# Altium PCB sensor PCB.PcbDoc
Units mm, origin at the board's own origin, x right, y up, seen from the top; angles counter-clockwise.
Board outline 39.37 x 30.48 mm, 2 copper layers (Top Layer, Bottom Layer); 33 components, 21 nets, 82 pads, 0 vias.
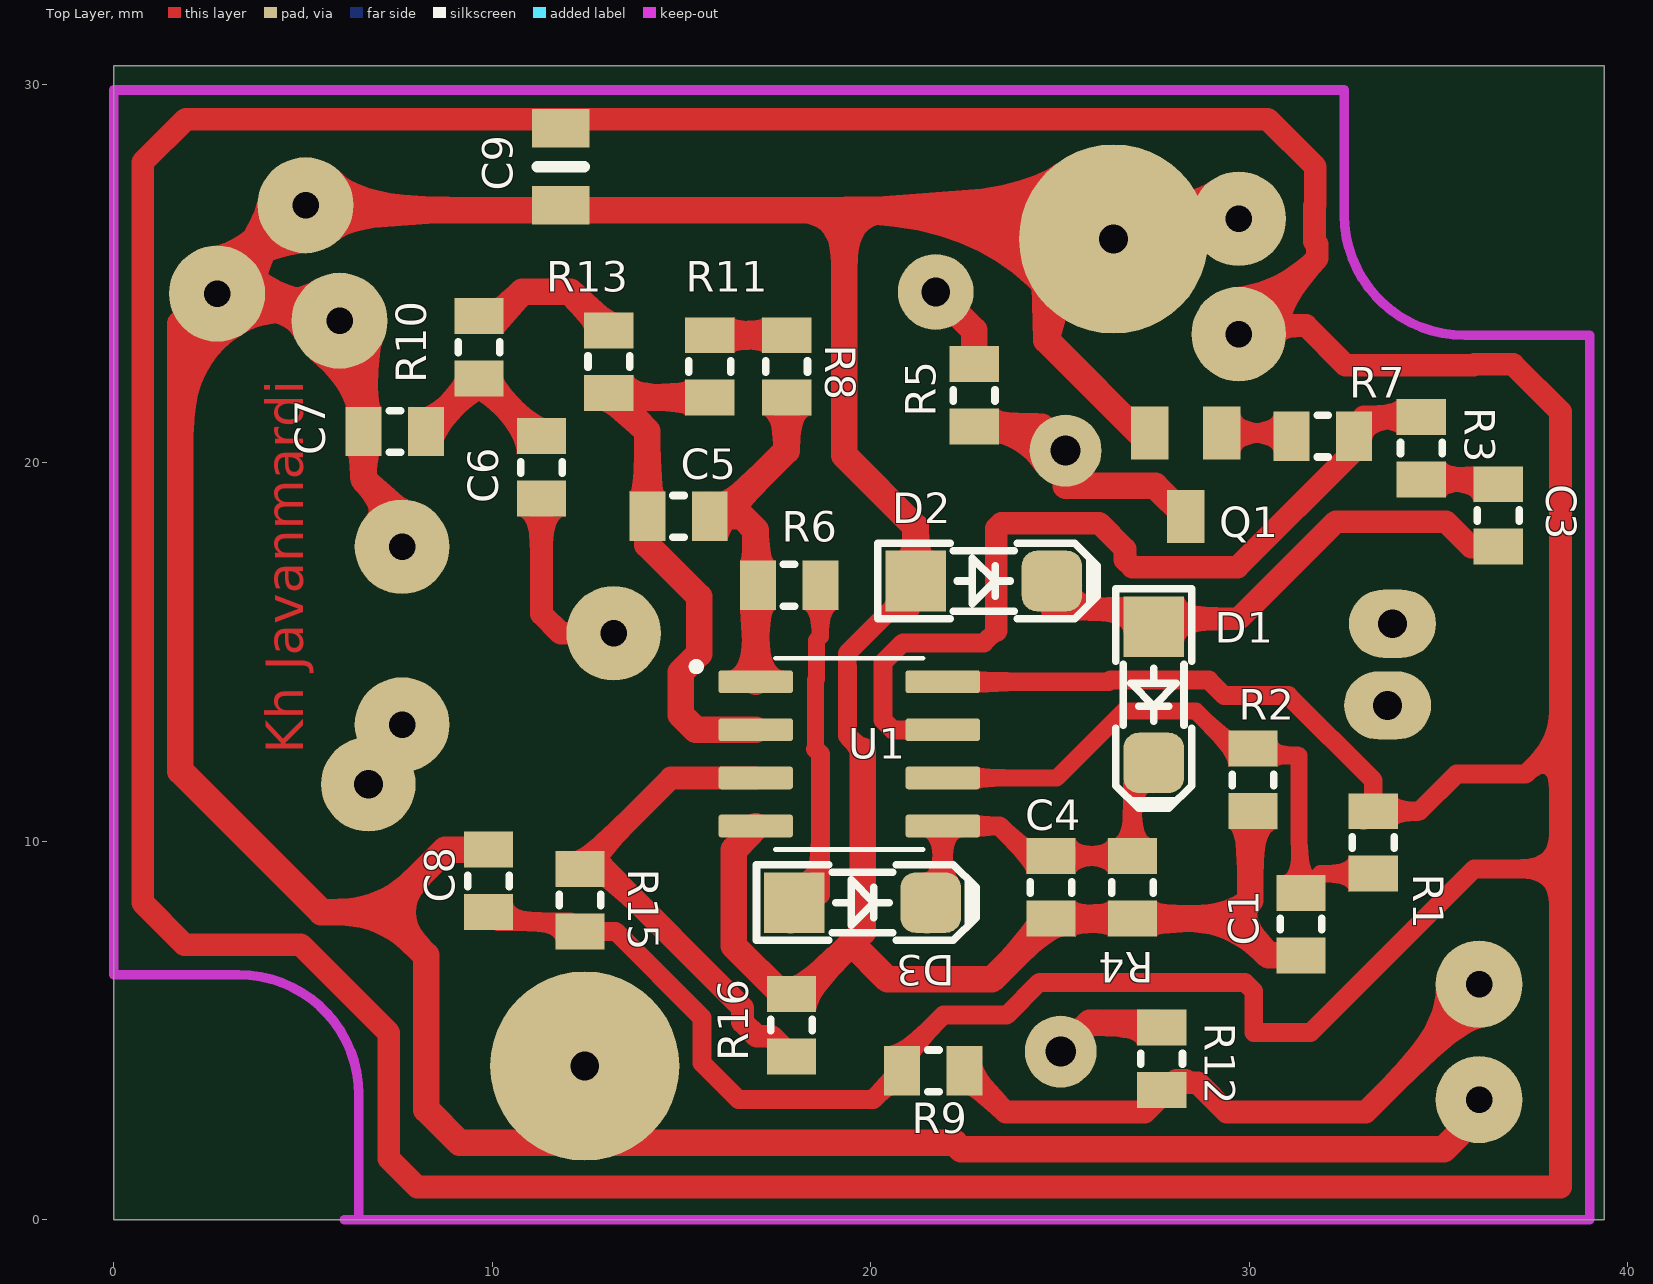
[diagram p0: Top Layer view]
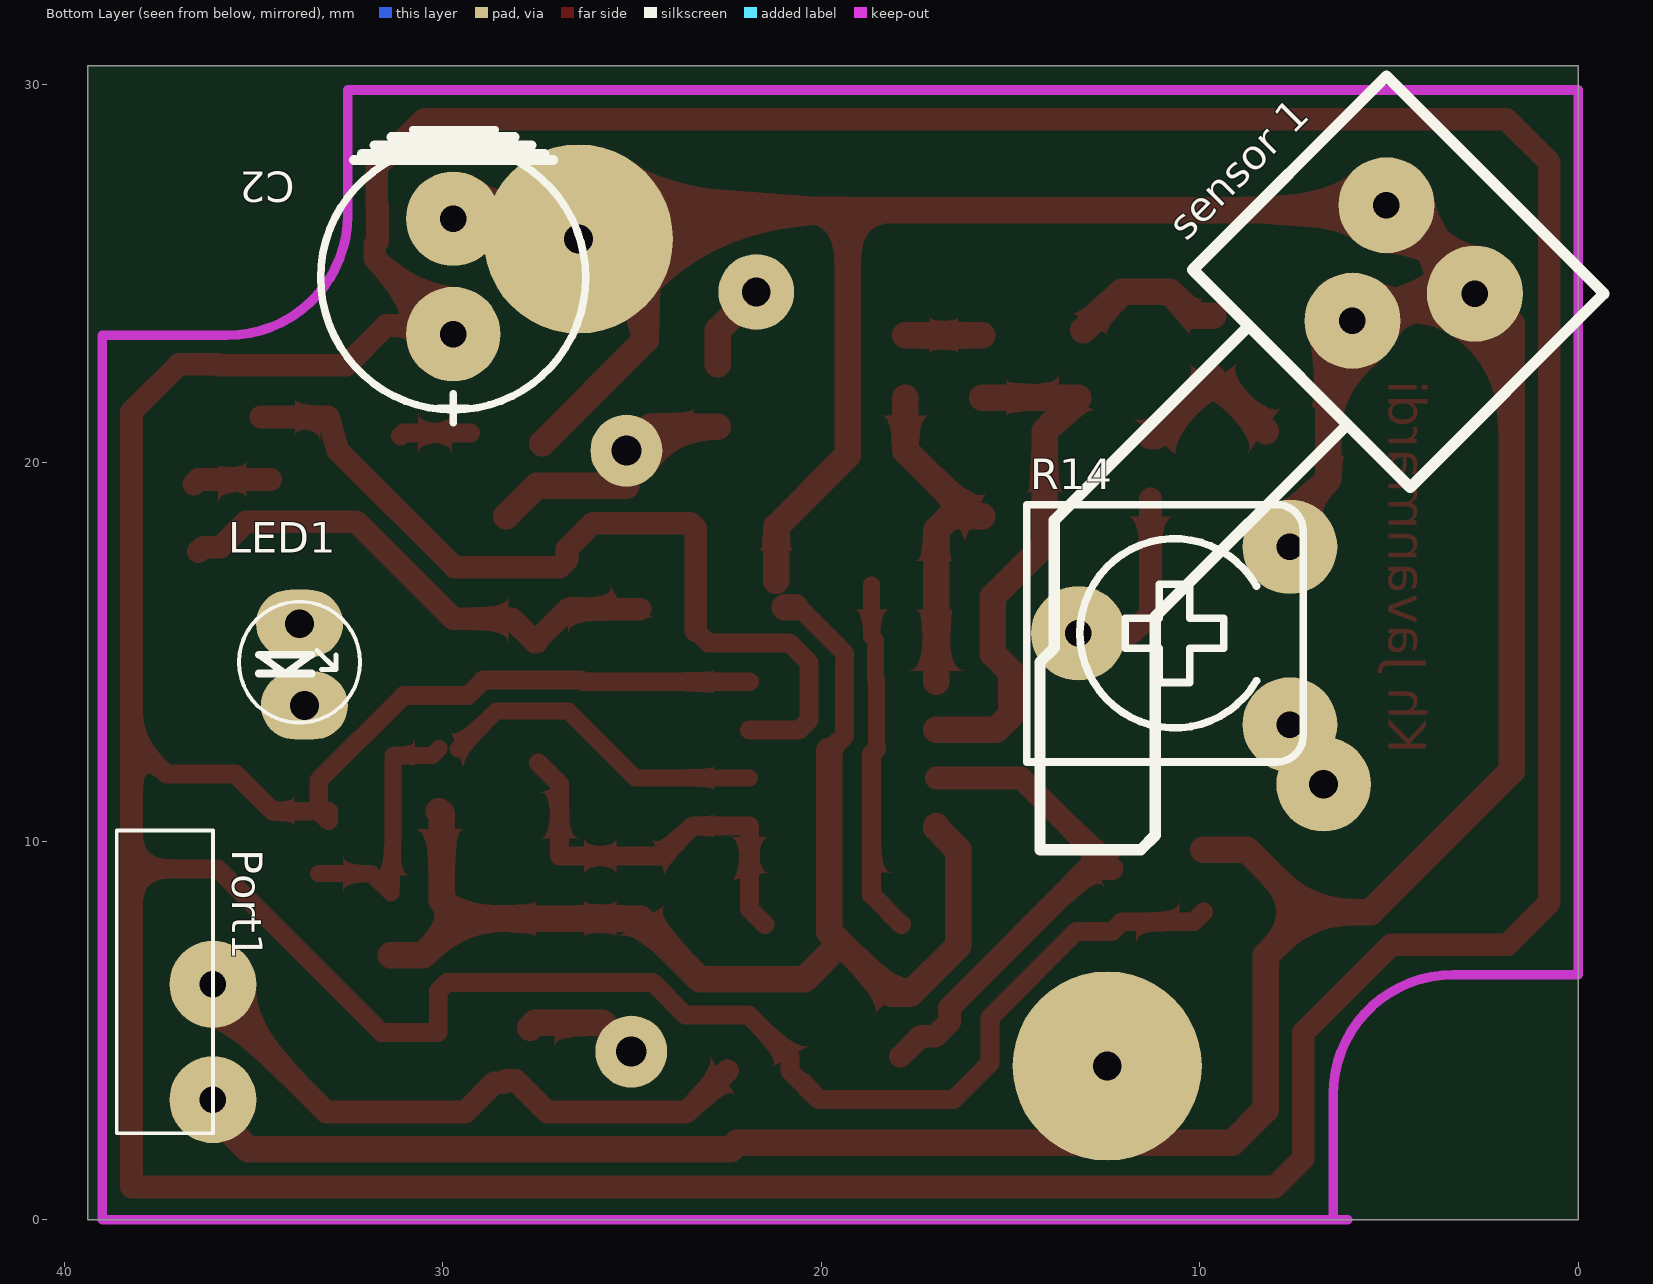
[diagram p1: Bottom Layer view, seen from below]
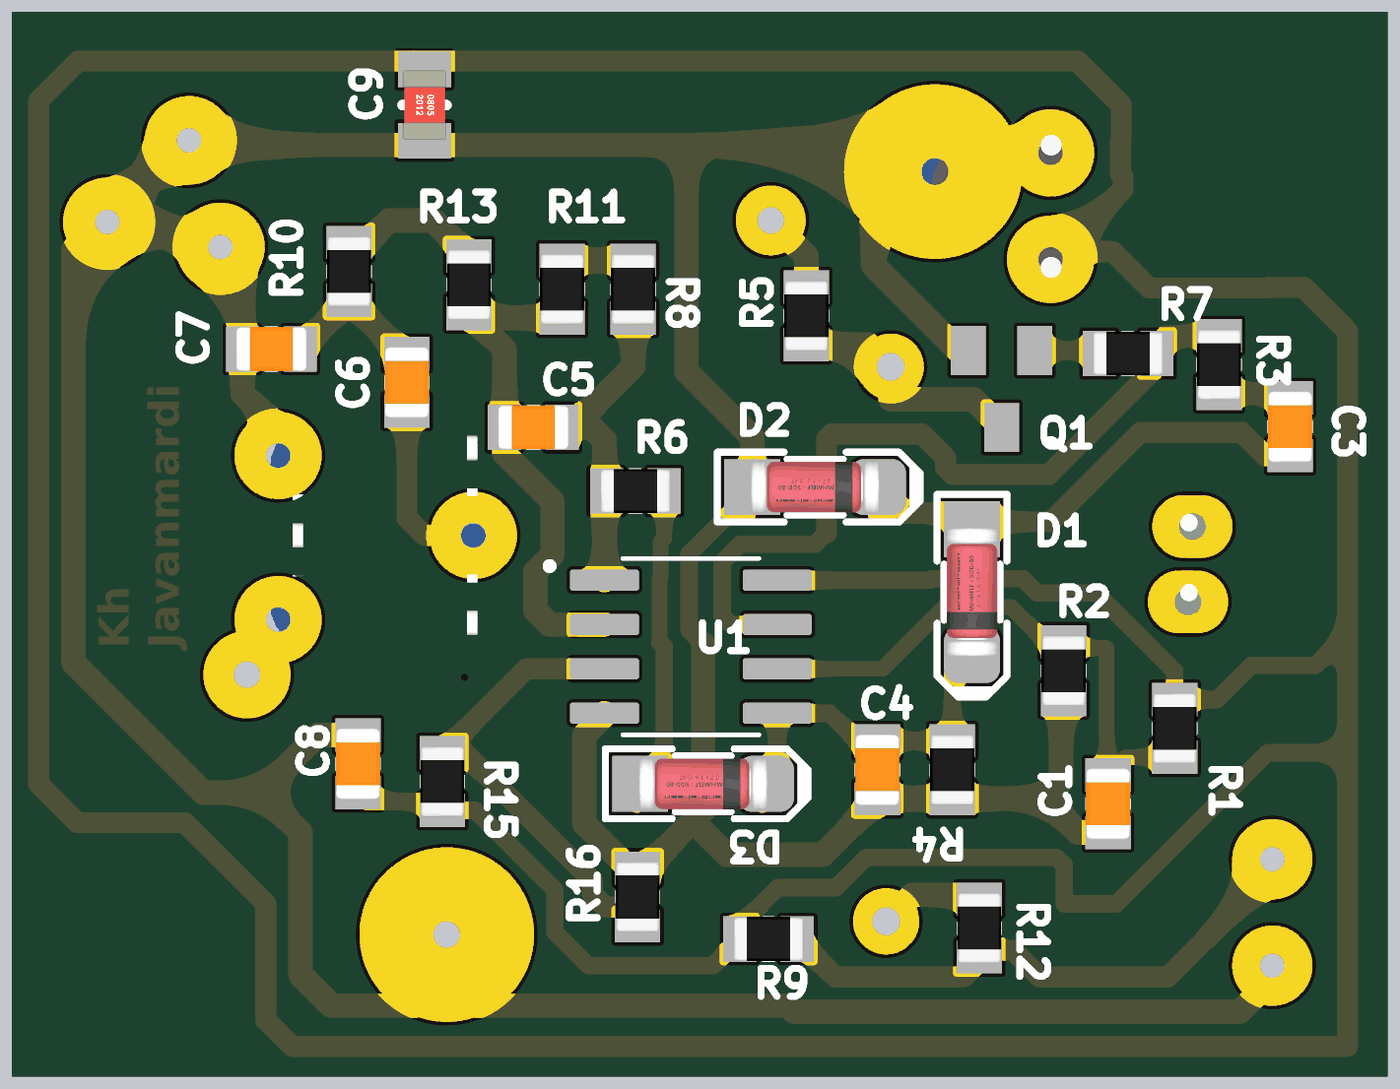
[diagram p2: 3D render of the assembled board from above, using the file's embedded part models]
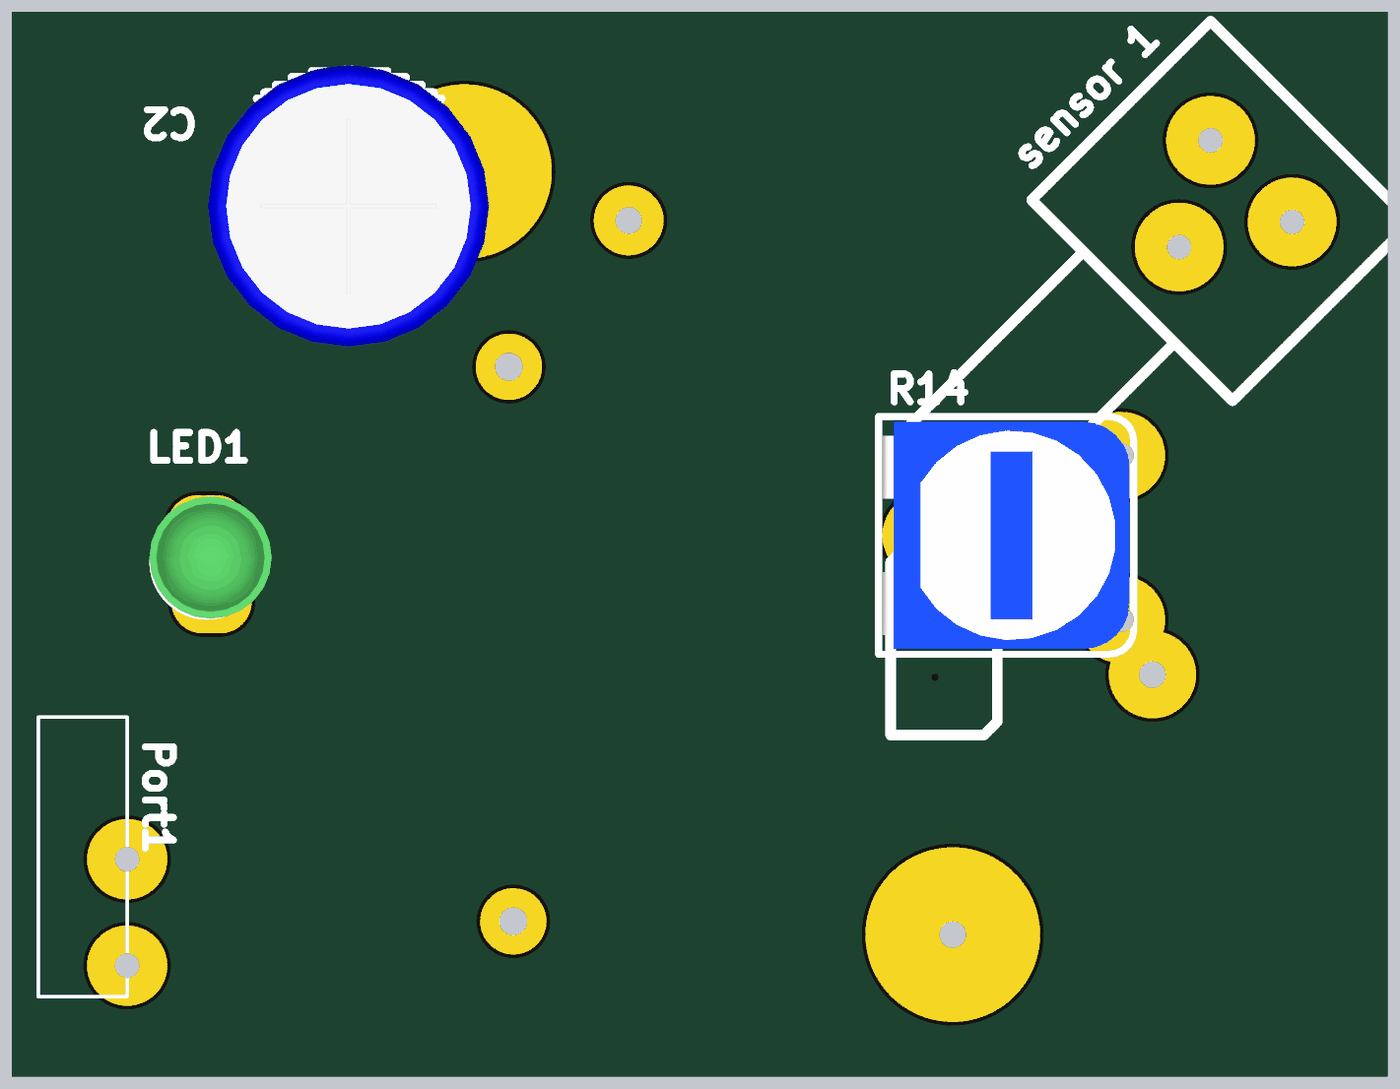
[diagram p3: 3D render of the assembled board from below, using the file's embedded part models]

## Layer stack, top to bottom
Top Solder: solder mask 0.0102, Solder Resist, Dk 3.5
Top Layer: signal copper 0.0356
Dielectric 1: dielectric 0.32, FR-4, Dk 4.8
Bottom Layer: signal copper 0.0356
Bottom Solder: solder mask 0.0102, Solder Resist, Dk 3.5

## Board outline
0,0 39.37,0 39.37,30.48 0,30.48

## Design rules (kind name [scope] priority, off if disabled: settings)
Clearance [All] p1: gap=0.343 ignorepadtopadclearanceinfootprint=FALSE
PolygonConnect [All] p1: thpad.connectstyle=Direct thpad.reliefconductorwidth=0.254 thpad.reliefentries=4 thpad.polygonreliefangle="90 Angle" thpad.airgapwidth=0.254 smdpad.connectstyle=Direct smdpad.reliefconductorwidth=0.254 smdpad.reliefentries=4 smdpad.polygonreliefangle="90 Angle" smdpad.airgapwidth=0.254 via.connectstyle=Relief via.reliefconductorwidth=0.254 via.reliefentries=4 via.polygonreliefangle="90 Angle" via.airgapwidth=0.254
RoutingLayers [All] p1: top layer_v5=TRUE bottom layer_v5=FALSE
RoutingVias [All] p1: holewidth=0.711 width=1.27 viastyle="Through Hole" minholewidth=0.711 minwidth=1.27 maxholewidth=0.711 maxwidth=1.27
SolderMaskExpansion [All] p1: expansion=0.102
Width [All] p1: maxlimit=0.7 minlimit=0.45 preferedwidth=0.6
29 further rules are at their usual default settings.

## Components (designator, comment, footprint, x,y, rotation, side; value= is the part's Value field where it differs from the comment)
C1 "470nf" SMD_CAP_0805 31.369,6.986 r90 top
C2 "100uf" "cap 03" 29.723,24.892 r270 bottom
C3 "470nf" SMD_CAP_0805 36.576,19.431 r270 top
C4 "470nf" SMD_CAP_0805 24.765,9.607 r270 top
C5 "100pf" SMD_CAP_0805 15.748,18.585 r180 top
C6 "100nf" SMD_CAP_0805 11.303,20.7 r270 top
C7 "1nf" SMD_CAP_0805 8.254,20.828 r180 top
C8 "100nf" SMD_CAP_0805 9.906,8.129 r90 top
C9 "Comment" SMD-0805C 11.811,27.813 r180 top
D1 "1N4148" D_SOD80 27.475,13.869 r270 top
D2 "1N4148" D_SOD80 22.987,16.876 r0 top
D3 "1N4148" D_SOD80 19.783,8.382 r0 top
LED1 "Red" LED-3mm 34.163,14.732 r270 bottom locked
Port1 "port" Port 38.989,6.731 r270 bottom
Q1 "BC945" SOT23-BEC 28.321,19.685 r180 top
R1 "330k" "RES 0805 (2012X06L)" 33.274,10.794 r270 top
R2 "150k" "RES 0805 (2012X06L)" 30.099,10.796 r90 top
R3 "47k" "RES 0805 (2012X06L)" 34.544,21.209 r270 top
R4 "1m" "RES 0805 (2012X06L)" 26.912,9.607 r270 top
R5 "100" "RES 0805 (2012X06L)" 22.733,20.955 r90 top
R6 "1k" "RES 0805 (2012X06L)" 18.669,16.764 r180 top
R7 "10k" "RES 0805 (2012X06L)" 32.766,20.701 r180 top
R8 "100" "RES 0805 (2012X06L)" 17.78,21.717 r90 top
R9 "1K" "RES 0805 (2012X06L)" 22.478,3.937 r180 top
R10 "NTC" "RES 0805 (2012X06L)" 9.652,22.226 r90 top
R11 "6.8m" "RES 0805 (2012X06L)" 15.748,23.367 r270 top
R12 "1k" "RES 0805 (2012X06L)" 27.686,5.08 r270 top
R13 "47k" "RES 0805 (2012X06L)" 13.081,23.495 r270 top
R14 "200k" POT_7X5 10.668,15.494 r270 bottom
R15 "330K" "RES 0805 (2012X06L)" 12.319,7.622 r90 top
R16 "47k" "RES 0805 (2012X06L)" 17.907,5.969 r270 top
"sensor 1" "Nock Sensor" Sensor 3.724,22.043 r225 bottom
U1 "LM358M/NOPB" SOIC127P599X175-8N 19.431,12.309 r0 top

## Footprints (in the part's own frame and the unit in brackets; to place one, negate y for a bottom-side part, rotate by r counter-clockwise, add the part's x,y. Pads: shape width x height; smd on the part's side, far side on the other; paste and mask are expansions set on the pad)
"cap 03" [mm]
  round 2.5 hole 0.7: 1(1.496,0.001) 2(-1.552,0.001)
  silkscreen extent -3.9,-3.5 3.84,3.5, body extent -4.05,-4.04 4,4.01, height 12.03
D_SOD80 [mm] "SOD-80 MINI-MELF 3.6X1.6mm, LL-34, LL4148"
  rect 1.6x1.6 smd: 1(-1.8,0)
  rrect50% 1.6x1.6 smd: 2(1.8,0)
  Top Layer pour cut-out: -1.016,1.016 1.016,1.016 1.016,-1.016 -1.016,-1.016
  silkscreen extent -2.8,-1 3,1, body extent -1.85,-0.8 1.85,0.8, height 2
LED-3mm [mil]
  oval 70.87x90.55 hole 30: 1(-40,15) 2(45,20)
  silkscreen extent -63,-48 63,78, body extent -74,-50 64,88, height 154
Port [mm]
  round 2.3 hole 0.7: 1(0.508,2.921) 2(3.556,2.921)
  silkscreen extent -3.56,0.38 4.45,2.92
POT_7X5 [mm] "POT, TRIM, 7.5X5.0mm, pitch: 5.0mm"
  round 2.5 hole 0.7: 1(2.413,3.048) 3(-2.286,3.048)
  round 2.5 hole 0.7 paste+0: 2(0,-2.54)
  silkscreen extent -3.4,-3.9 3.4,3.4, body extent -3.25,-3.77 3.25,3.28, height 7
"RES 0805 (2012X06L)" [mm] "Chip Resistor, 2-Leads, Body 2.0x1.3mm, IPC High Density _ (0.100 W)"
  rect 0.95x1.3 smd: 1(0,0) 2(1.65,0)
  silkscreen extent 0.67,-0.55 0.98,0.55, body extent -0.19,-0.63 1.84,0.64, height 0.6
Sensor [mil]
  round 100 hole 27.56: 1(-170,95) 2(-40,95) 3(-110,-15)
  round 0 all layers, no hole: 4(38.49,-552.4)
  silkscreen extent -265,-634 123,190, body extent 120,-155 120,-155, height 63
SMD-0805C [mil]
  rect 60x40 smd: 1(0,40) 2(0,-40)
  silkscreen extent -25,0 25,0, body extent -25,-39 25,39, height 35
SMD_CAP_0805 [mm]
  rect 0.95x1.3 smd: 1(0,0) 2(1.65,0)
  silkscreen extent 0.67,-0.55 0.98,0.55, body extent -0.19,-0.63 1.84,0.63, height 0.65
SOIC127P599X175-8N [mm]
  rrect25% 1.97x0.6 smd: 1(-2.47,1.905) 2(-2.47,0.635) 3(-2.47,-0.635) 4(-2.47,-1.905) 5(2.47,-1.905) 6(2.47,-0.635) 7(2.47,0.635) 8(2.47,1.905)
  silkscreen extent -4.14,-2.53 1.95,2.53
SOT23-BEC [mm]
  rect 1x1.4 smd: B(-0.95,-1.1) C(0,1.1) E(0.95,-1.1)

## Part data
C1 C3 C4 C5 C6 C7 C8: library part Cap-Bipolar, "Bipolar Capacitor", Voltage=100V, Adding Date=1387/12/20, Designer="Saeid Jorablo", Organazation=ControTec
C2: library part Cap-Polar, "Polar Capacitor", Voltage=25v, Adding Date=1387/12/20, Designer="Saeid Jorablo", Organazation=ControTec
D1 D2 D3: library part DIODE_SMD_1N4148, "DIODE, FAST SWTICHING, 0.3A, 0.5W", =http://www.chila.ir, ASSEMBLY=ASSEMBLY, DESC=DESCRIPTION, MANF=MANF, MANF_P#=1N4148, PARAM=75V, PARAM2="300mA, 0.5W", PRICE=PRICE
LED1: library part LED, "LED", Adding Date=1387/12/22, Color=Red, Designer="Saeid Jorablo", Organazation=ControTec
Q1: library part BCW31*, "Bipolar _BJT_ Transistor NPN General Purpose Amplifier Surface Mount", Package="SOT-23 ON Semiconductor", Availability=Unavailable, MF="ON Semiconductor", MP=BCW31, PRICE=None, SnapEDA_Link=https://www.snapeda.com/parts/BCW31/ON%20Semiconductor/view-part/573820/?ref=snap
R1 R2 R3 R4 R5 R6 R7 R8 R9 R10 R11 R12 R13 R15 R16: library part Resistor, "Resistor"
R14: library part RES_THD_POT_7X5, "RESISTOR, THD, Potentiometer", =http://www.chila.ir
U1: "2-Channel, 1MHz, industry standard, 32V op amp 8-SOIC 0 to 70", Package="SOIC-8 Texas Instruments", Check_prices=https://www.snapeda.com/parts/LM358M/Texas%20Instruments/view-part/4800527/?ref=eda, Digi-Key_Part_Number=LM358MX/NOPBTR-ND, DigiKey-Purchase-URL=https://snapeda.com/shop?store=DigiKey&id=4800527, MF="Texas Instruments", MP=LM358M, SnapEDA_Link=https://www.snapeda.com/parts/LM358M/Texas%20Instruments/view-part/4800527/?ref=snap

## Free pads (board coordinates)
  round 1.9 hole 0.8: 8(25.146,20.32) 9(25.019,4.445)
  round 5 hole 0.762: 10(26.416,25.908) 11(12.446,4.064)
  round 2 hole 0.762: 12(21.717,24.511)
  round 2.5 hole 0.762: 13(6.731,11.506)

## Nets (pads, with @x,y where several pads share a name; then routed paths per layer and width w, separated by ;. In a path a pad name is that pad's centre, name@x,y a point inside that pad or via, vN(x,y) a via of type N, cw(c..) or ccw(c..) an arc to the next point about the centre after c; other vN are vias at no path point)
3: R15.2 R16.2 U1.3 | length 13.5
  Top Layer w0.6: U1.3 14.721,11.674 R15.2 12.946,9.272 16.614,5.604 16.614,5.228 16.991,4.851 17.375,4.851 R16.2
5: C4.1 D1.2 D3.2 R4.1 U1.5 | length 10.8
  Top Layer w0.5: D3.2@21.485,7.799 21.901,8.215 U1.5@21.901,10.357 ; U1.5 23.401,10.404 24.198,9.607 C4.1 R4.1 26.912,11.506 D1.2
6: C1.2 R1.2 R2.2 U1.6 | length 15.9
  Top Layer w0.45: U1.6 24.911,11.674 26.674,13.437 28.593,13.437 R2.2@29.591,12.439 ; R2.2 30.278,12.267 31.317,12.267 31.317,10.086 C1.2 31.877,9.144 R1.2
7: R3.1 R7.1 U1.7 | length 23.4
  Top Layer w0.5: U1.7 20.584,12.944 20.323,13.205 20.323,14.716 20.848,15.24 22.987,15.24 23.314,15.567
  Top Layer w0.6: 23.314,15.567 23.314,18.26 23.453,18.399 26.04,18.399 26.716,17.723 26.716,17.439 26.912,17.242 29.691,17.242 32.766,20.317 32.867,20.672 33.02,21.209 R3.1 R3.1@34.798,21.209
GND: "sensor 1.1" "sensor 1.2" "sensor 1.3" C1.1 C2.2 C4.2 C7.2 C8.2 C9.1 D2.1 pad.10 pad.11 Port1.2 Q1.E R2.1 R4.2 R14.3 R16.1 U1.4 | length 148.9
  Top Layer w0.5: 19.783,12.387 19.382,12.788 19.382,14.611 19.38,14.612 19.38,14.965 20.598,16.183 D2.1@20.691,16.183
  Top Layer w0.7: 2.736,24.648 1.763,23.675 1.763,11.855 5.49,8.128 7.112,8.128 ; 5.969,23.749 6.604,23.114 C7.2 6.604,19.559 7.62,18.543 R14.3 R14.3@6.859,17.78 ; 6.096,24.13 3.582,24.13 2.863,24.848 5.198,27.183 5.711,26.67 19.304,26.67 ; C8.2 8.763,9.779 7.112,8.128 ; U1.4 16.961,10.357 16.383,9.779 16.383,7.239 17.653,5.969 R16.1 18.15,5.969 19.489,7.308 ; 19.783,12.387 19.783,7.602 19.489,7.308 ; D2.1@20.691,16.183 D2.1@20.965,16.183 ; D2.1 21.187,18.31 19.304,20.193 19.304,26.67 ; Q1.E@27.371,20.508 24.638,23.241 24.638,25.019 pad.10@26.289,26.67 ; pad.10@28.575,26.67 pad.10@26.289,26.67 ; R2.1 30.026,10.723 30.026,8.446 29.537,7.957 ; C1.1 30.508,6.986 29.537,7.957 ; Port1.2@36.068,3.048 35.941,3.175 35.941,2.667 35.133,1.859 22.391,1.859 22.218,2.032 9.144,2.032 8.261,2.915 8.261,6.985 8.255,6.985 7.112,8.128 ; 19.304,26.67 pad.10@26.289,26.67 ; 19.489,7.308 20.447,6.35 23.199,6.35 24.765,7.916 C4.2 R4.2 29.537,7.957
NetC3_1: C3.1 R3.2 | length 2.1
  Top Layer w0.6: R3.2 36.448,19.559 C3.1
NetC3_2: C3.2 D1.1 D2.2 | length 13.7
  Top Layer w0.6: D2.2@24.787,16.129 26.692,16.129 D1.1@27.559,15.262 ; D1.1@27.514,15.262 D1.1@27.559,15.262 ; C3.2@36.449,17.654 36.334,17.769 35.869,17.769 35.197,18.441 32.284,18.441 29.723,15.88 28.177,15.88 D1.1@27.559,15.262
NetC5_1: C5.1 R6.2 R8.1 U1.1 | length 9.2
  Top Layer w0.7: C5.1 C5.1@16.045,18.585 ; U1.1 16.961,18.219 16.595,18.585 C5.1@16.045,18.585 ; R8.1 17.78,20.32 C5.1@16.045,18.585
NetC5_2: C5.2 R11.2 R13.2 U1.2 | length 14.2
  Top Layer w0.7: R11.2 13.209,21.717 14.098,20.828 C5.2 14.098,17.833 15.471,16.46 15.471,14.956 14.986,14.471 14.986,13.341 15.383,12.944 U1.2
NetC6_1: C6.1 C7.1 R10.1 | length 4.3
  Top Layer w0.7: C7.1 R10.1 11.178,20.7 C6.1
NetC6_2: C6.2 R14.2 | length 5.2
  Top Layer w0.6: C6.2 11.303,16.002 11.811,15.494 R14.2
NetD3_1: D3.1 R6.1 | length 9.4
  Top Layer w0.45: 18.537,14.263 18.562,14.288 18.562,15.303 18.669,15.41 R6.1 ; 18.539,12.439 18.539,14.262
  Top Layer w0.5: D3.1@17.885,7.799 18.669,8.583 18.669,12.309 18.539,12.439
NetLED1_1: pad.9 R12.1 | length 3
  Top Layer w0.7: pad.9 25.781,5.207 27.559,5.207 R12.1
NetLED1_2: pad.8 Q1.C R5.1 | length 7.1
  Top Layer w0.7: R5.1 24.511,20.955 pad.8 25.146,19.392 27.514,19.392 Q1.C
NetPort1_1: Port1.1 R9.1 R12.2 | length 17.3
  Top Layer w0.6: R9.1 23.563,2.852 27.236,2.852 28.068,3.684 28.321,3.684 28.384,3.621 28.637,3.621 29.406,2.852 33.078,2.852 35.941,5.715 Port1.1@35.941,6.096 ; Port1.1@35.931,6.096 Port1.1@35.941,6.096 ; Port1.1@36.068,6.096 Port1.1@35.941,6.096 ; Port1.1@36.068,7.067 Port1.1 Port1.1@35.941,6.096
NetPort1_3: pad.12 R5.2 | length 2.3
  Top Layer w0.7: pad.12 22.733,23.495 R5.2
NetQ1_B: Q1.B R7.2 | length 1.9
  Top Layer w0.5: Q1.B 31.032,20.785 R7.2
NetR8_2: R8.2 R11.1 | length 2
  Top Layer w0.7: R11.1 R8.2
NetR10_2: R10.2 R13.1 | length 4.1
  Top Layer w0.7: R10.2 10.16,23.876 10.795,24.511 12.065,24.511 R13.1
NetR14_1: pad.13 R14.1 | length 1.9
  Top Layer w0.5: pad.13 6.731,12.192 R14.1
vcc-out: C2.1 C8.1 C9.2 R1.1 R9.2 R15.1 U1.8 | length 184.1
  Top Layer w0.5: C8.1 10.161,7.874 12.067,7.874 R15.1 13.262,7.622 15.539,5.345 15.539,4.146 16.51,3.175 20.066,3.175 R9.2 20.828,4.318 21.917,5.407 23.59,5.407 24.457,6.275 29.886,6.275 30.118,6.043 30.118,4.945 31.615,4.945 35.942,9.272 38.219,9.272 ; U1.8 26.295,14.214 26.336,14.255 28.932,14.255 29.339,13.848 31.035,13.848 33.274,11.609 33.274,10.799 R1.1@33.269,10.794 ; 38.219,12.7 37.295,11.776 35.473,11.776 34.491,10.794 R1.1 R1.1@33.269,10.794 ; R1.1@33.269,10.794 33.02,10.794 33.02,10.545 R1.1@33.269,10.794
  Top Layer w0.6: 0.77,8.374 0.77,27.94 1.905,29.075 30.488,29.075 31.742,27.821 31.742,26.801 31.72,26.78 31.72,25.845 31.797,25.769 31.797,25.403 30.015,23.622 31.496,23.622 32.542,22.576 35.924,22.576 35.945,22.598 36.965,22.598 38.219,21.344 38.219,12.7 38.219,9.272 38.219,0.866 8.024,0.866 7.269,1.621 7.269,4.945 4.945,7.269 1.875,7.269 0.77,8.374
pads on no net: "sensor 1.4" LED1.1 LED1.2

## Polygon pours and split planes (outlines as drawn)
no net on Top Layer "Top Layer-No Net 1" (solid, remove dead copper, pour order 8): 39.37,30.48
no net on Top Layer "Top Layer-No Net" (solid, remove dead copper, pour order 6): 39.243,30.607
GND on Top Layer "Top Layer-GND 1" (solid, remove dead copper, pour order 4): 53.213,30.861

## Keep-outs
Keep-Out Layer:
  lines w0.254: 3.302,6.477 0,6.477 0,29.845 32.512,29.845 32.512,26.413 ; 3.302,6.48 cw(c3.302,3.302) 6.48,3.302 ; 6.096,0 38.989,0 38.989,23.368 35.687,23.368 ; 6.477,0 6.477,3.432 ; 32.509,26.543 ccw(c35.687,26.543) 35.687,23.365

## Other copper
Top Layer:
  text "Kh Javanmardi" at 5.334,12.319 h1.7 r90